# Altium PCB OpAmp_PSU_01.PcbDoc
Units mm, origin at the board's own origin, x right, y up, seen from the top; angles counter-clockwise.
Board outline 25 x 15.75 mm, 2 copper layers (Top Layer, Bottom Layer); 15 components, 9 nets, 58 pads, 14 vias.
Unrouted connection lines stored in the file: 15.
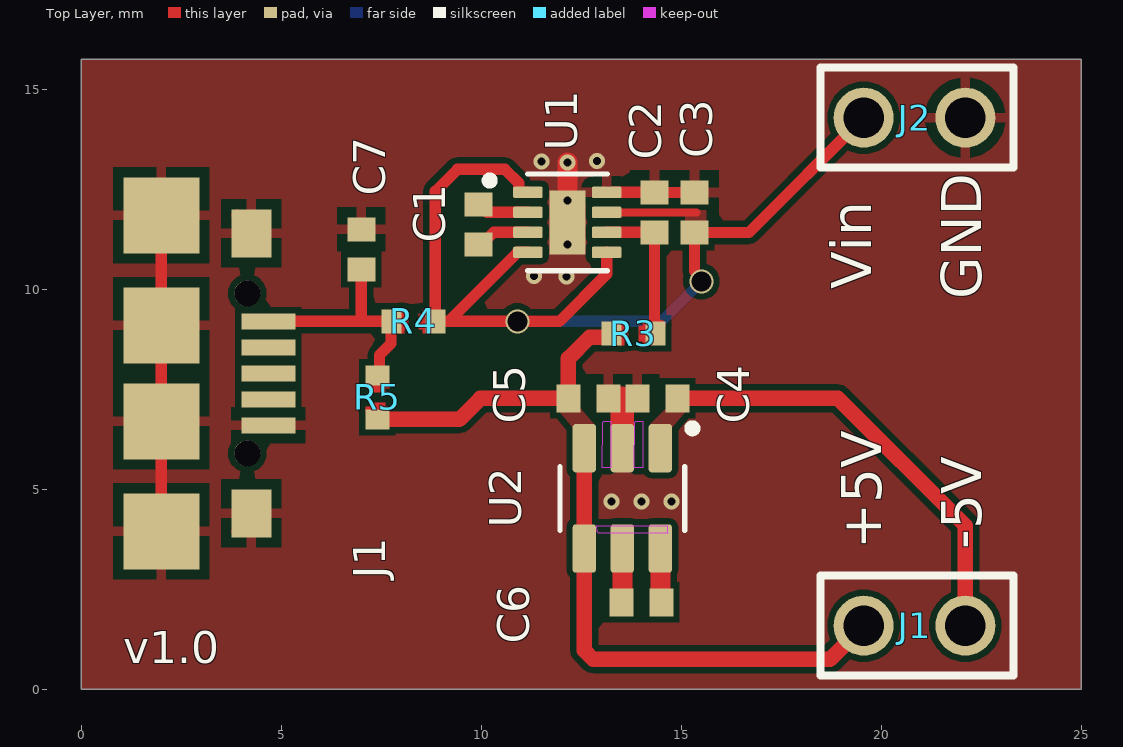
[diagram p0: Top Layer view]
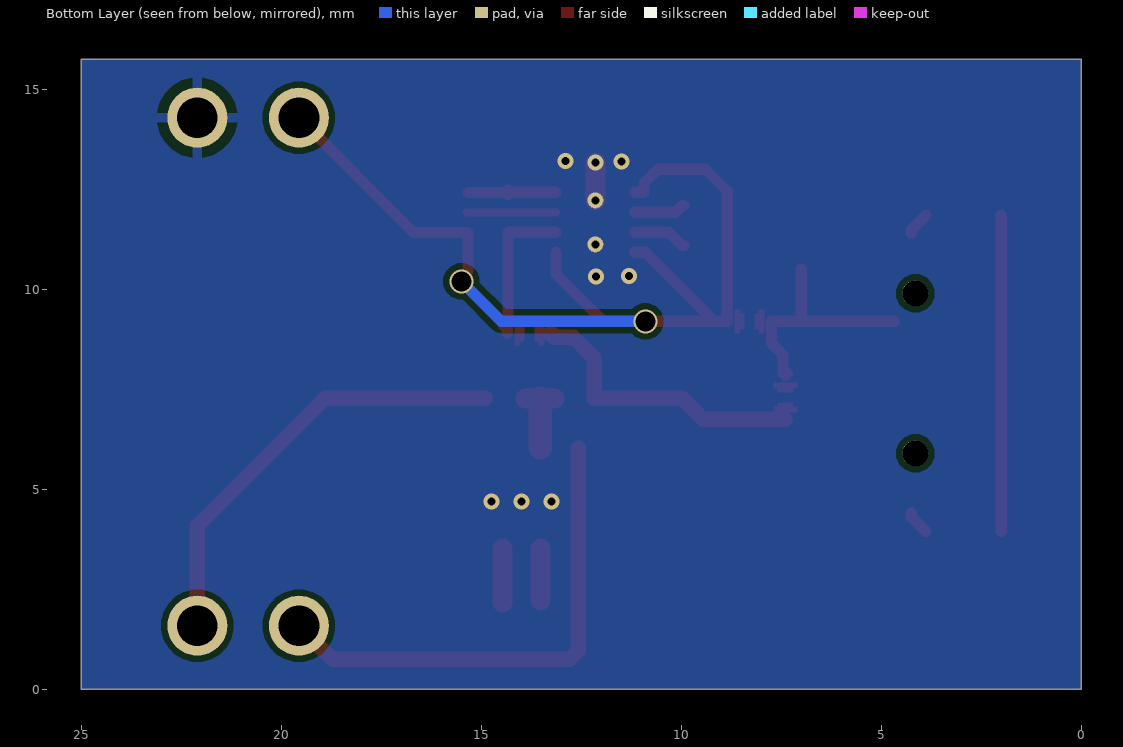
[diagram p1: Bottom Layer view, seen from below]
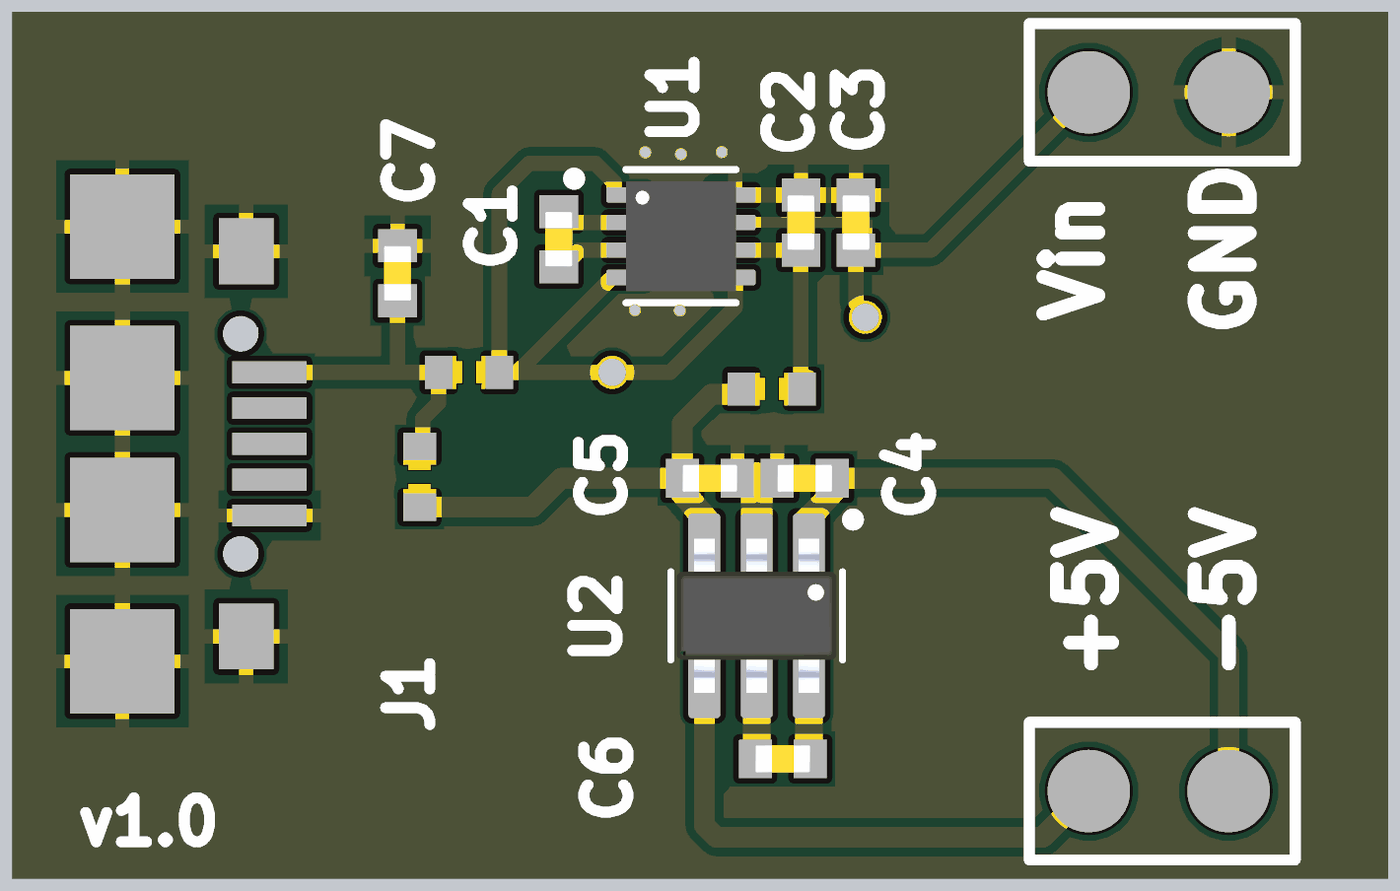
[diagram p2: 3D render of the assembled board from above, using the file's embedded part models]

## Layer stack, top to bottom
Top Solder: solder mask 0.0102, Solder Resist, Dk 3.5
Top Layer: signal copper 0.0356
Dielectric 1: dielectric 0.32, FR-4, Dk 4.8
Bottom Layer: signal copper 0.0356
Bottom Solder: solder mask 0.0102, Solder Resist, Dk 3.5

## Board outline
0,0 25,0 25,15.75 0,15.75

## Design rules (kind name [scope] priority, off if disabled: settings)
Clearance "merge with traces" [InNamedPolygon('Bottom Layer-AX1')] p1: gap=0.15 ignorepadtopadclearanceinfootprint=TRUE
Clearance [All] p2: gap=0.15 ignorepadtopadclearanceinfootprint=FALSE
HoleSize [All] p1: absolutevalues=TRUE maxlimit=6 minlimit=0.2 maxpercent=80.000 minpercent=20.000
PolygonConnect [All] p1: connectstyle=Direct reliefconductorwidth=0.254 reliefentries=4 polygonreliefangle="90 Angle" airgapwidth=0.254
RoutingVias [All] p1: holewidth=0.711 width=1.27 viastyle="Through Hole" minholewidth=0.711 minwidth=1.27 maxholewidth=0.711 maxwidth=1.27
SolderMaskExpansion [All] p1: expansion=0.102 istentingtop=FALSE
Width [All] p1: maxlimit=1 minlimit=0.15 preferedwidth=0.5 minimp=50.000000 maximp=50.000000 favimp=50.000000
29 further rules are at their usual default settings.

## Classes and differential pairs
component class OpAmp_PSU_01: C1 C2 C3 C4 C5 C6 C7 J1 J2 R3 R4 R5 U1 U2

## Components (designator, comment, footprint, x,y, rotation, side; value= is the part's Value field where it differs from the comment)
C1 "1uF 0402 Cap" "0402 CAP" 9.929,11.621 r90 top
C2 "10uF 0402 Cap" "0402 CAP" 14.329,11.921 r90 top
C3 "10uF 0402 Cap" "0402 CAP" 15.329,11.921 r90 top
C4 "10uF 0402 Cap" "0402 CAP" 14.4,7.275 r180 top
C5 "10uF 0402 Cap" "0402 CAP" 12.675,7.275 r0 top
C6 "1uF 0402 Cap" "0402 CAP" 14,2.175 r0 top
C7 "10uF 0402 Cap" "0402 CAP" 7,11 r90 top
J1 "2 1 pin straight" "2 1 PIN STARIGHT" 19.56,1.59 r0 top
J1 "USB Connectors SMD RoHS   Source:  Datasheet" C40942 2.925,7.9 r270 top
J2 "2 1 pin straight" "2 1 PIN STARIGHT" 19.56,14.29 r0 top
R3 "0402 Broken Pad" "0402 BROKEN PAD" 13.8,8.9 r180 top
R4 "0402 Broken Pad" "0402 BROKEN PAD" 8.3,9.2 r0 top
R5 "0402 Broken Pad" "0402 BROKEN PAD" 7.4,7.3 r270 top
U1 "LM2775DSGR" SON50P200X200X80-9N 12.15,11.675 r0 top
U2 "LM2776DBVR" SOT95P280X145-6N 13.525,4.775 r270 top

## Footprints (in the part's own frame and the unit in brackets; to place one, negate y for a bottom-side part, rotate by r counter-clockwise, add the part's x,y. Pads: shape width x height; smd on the part's side, far side on the other; paste and mask are expansions set on the pad)
"2 1 PIN STARIGHT" [mm]
  round 1.5 smd mask+0.05: 1(0,0) 2(2.54,0)
  round 1.5 smd far side mask+0.05: 1(0,0) 2(2.54,0)
  silkscreen extent -1.08,-1.25 3.75,1.25
"0402 BROKEN PAD" [mm]
  rect 0.5x0.6 smd: 1(-0.55,0) 2(0.55,0)
  Top Layer region: -0.275,-0.2 -0.125,-0.2 -0.125,0.2 -0.275,0.2
  Top Layer region: 0.125,-0.2 0.275,-0.2 0.275,0.2 0.125,0.2
  Top Layer region: -0.375,-0.3 -0.225,-0.3 -0.225,0.3 -0.375,0.3
  Top Layer region: 0.225,-0.3 0.375,-0.3 0.375,0.3 0.225,0.3
"0402 CAP" [mm]
  rect 0.6x0.7 smd: 1(-0.5,0) 2(0.5,0)
  body extent -0.5,-0.25 0.5,0.25, height 0.5
C40942 [mm]
  rect 0.4x1.35 smd: 1(-1.3,1.75) 2(-0.65,1.75) 3(0,1.75) 4(0.65,1.75) 5(1.3,1.75)
  round 0.65 hole 0.65 unplated: MH1(-2,1.225) MH2(2,1.225)
  rect 1.9x1.9 smd: MP1(-3.95,-0.925) MP2(3.95,-0.925) MP3(-1.2,-0.925) MP4(1.2,-0.925)
  rect 1.2x1 smd: MP5(-3.5,1.325) MP6(3.5,1.325)
SON50P200X200X80-9N [mm]
  rrect25% 0.74x0.28 smd: 1(-0.985,0.75) 2(-0.985,0.25) 3(-0.985,-0.25) 4(-0.985,-0.75) 5(0.985,-0.75) 6(0.985,-0.25) 7(0.985,0.25) 8(0.985,0.75)
  rect 0.9x1.6 smd paste-2: 9(0,0)
  round 0.4 hole 0.2 mask+0: 9_1(0,0.55) 9_2(0,-0.55)
  silkscreen extent -2.04,-1.21 1,1.21, body extent -1,-1 1,1, height 0.8
SOT95P280X145-6N [mm]
  rrect25% 1.21x0.58 smd: 1(-1.255,0.95) 2(-1.255,0) 3(-1.255,-0.95) 4(1.255,-0.95) 5(1.255,0) 6(1.255,0.95)
  silkscreen extent -1.85,-1.56 0.8,1.85, body extent -1.4,-1.45 1.4,1.45, height 1.45

## Part data
C1 C6: "C52923", Supplier Part Number 1=1276-1445-1-ND, ComponentLink1Description="New link", Supplier 1=Digi-Key
C2 C3 C4 C5 C7: "C15525", Supplier Part Number 1=1276-1451-1-ND, ComponentLink1Description="New link", Supplier 1=Digi-Key
J1: library part C40942, "C40942", Manufacturer_Name="Jing Extension of the Electronic Co.", DeviceSetName=C40942, GateName_1=G$1, Height=2.55mm, LibraryName=C40942, Manufacturer_Part_Number=C40942, Package=C40942, SymbolName_1=C40942
U1: "C473361", Package=None, Supplier Part Number 1=296-46107-1-ND, Availability=Unavailable, MF="{'manufacturer': u'Texas Instruments'}", MP=LM2775DSGR, Price=None, Supplier 1=Digi-Key
U2: "C69527", Package=None, Supplier Part Number 1=296-43957-1-ND, Availability=Unavailable, MF="{'manufacturer': u'Texas Instruments'}", MP=LM2776DBVR, Price=None, Supplier 1=Digi-Key

## Via types
v1: diameter 0.4, hole 0.2, Top Layer to Bottom Layer, tented both sides, 8 vias
v2: diameter 1.02, hole 1.02, Top Layer to Bottom Layer, 4 vias
v3: diameter 0.6, hole 0.5, Top Layer to Bottom Layer, 2 vias

## Nets (pads, with @x,y where several pads share a name; then routed paths per layer and width w, separated by ;. In a path a pad name is that pad's centre, name@x,y a point inside that pad or via, vN(x,y) a via of type N, cw(c..) or ccw(c..) an arc to the next point about the centre after c; other vN are vias at no path point)
+VOUT: C5.1 J1.1@19.56,1.59 R3.2 R5.2 U2.3 U2.4 | length 19.8
  Top Layer w0.381: R5.2 9.45,6.75 9.975,7.275 C5.1 12.175,8.275 12.702,8.802 13.191,8.802 13.25,8.861 R3.2 ; U2.3 U2.4 12.575,0.973 12.798,0.75 18.72,0.75 v2(19.56,1.59)
-VOUT: C4.1 J1.2@22.1,1.59 U2.1 | length 11
  Top Layer w0.381: C4.1 18.915,7.275 22.1,4.09 v2(22.1,1.59)
GND: C2.2 C3.2 C4.2 C5.2 C7.2 J1.5 J1.MP1 J1.MP2 J1.MP3 J1.MP4 J1.MP5 J1.MP6 J2.2 U1.8 U1.9 U1.9_1 U1.9_2 U2.2 | length 14.2
  Top Layer w0.28: J1.MP2 J1.MP4 J1.MP3 J1.MP1 ; J1.MP6@3.89,3.95 4.25,4.31 J1.MP6 ; J1.MP5@3.89,11.85 4.25,11.49 J1.MP5 ; U1.8 C2.2@14.325,12.425 ; C2.2 C3.2
  Top Layer w0.381: C2.2@14.325,12.425 C2.2
  Top Layer w0.5: U1.9_1 v1(12.15,13.166) ; C5.2 13.525,7.275 C4.2
  Top Layer w0.58: U2.2 13.525,7.275
  other v1: 13.25,4.7 14,4.7 14.75,4.7 12.129,10.324 11.313,10.331 11.5,13.2 12.891,13.203
  other v2: 22.1,14.29
NetC1_1: C1.1 U1.3 | length 1.4
  Top Layer w0.28: C1.1@9.929,11.096 9.979,11.096 10.308,11.425 U1.3
NetC1_2: C1.2 U1.2 | length 1.3
  Top Layer w0.28: C1.2@9.929,12.096 9.979,12.096 10.15,11.925 U1.2
NetC2_1: C2.1 R3.1 U1.6 | length 3.7
  Top Layer w0.28: U1.6 14.325,11.425 C2.1 R3.1@14.329,9.179 ; R3.1 14.35,9 R3.1@14.46,9.11
NetC6_1: C6.1 U2.5 | length 1.4
  Top Layer w0.381: C6.1@13.475,2.175 C6.1@13.525,2.225
  Top Layer w0.5: C6.1@13.525,2.225 U2.5
NetC6_2: C6.2 U2.6 | length 1.3
  Top Layer w0.5: C6.2@14.475,2.175 U2.6
VIN: C3.1 C7.1 J1.1@4.675,9.2 J2.1 R4.1 R4.2 R5.1 U1.1 U1.4 U1.5 U1.7 | length 34.1
  Top Layer w0.2: U1.7 15.375,11.925
  Top Layer w0.28: J1.1@4.675,9.2 7,9.2 ; C7.1 7,9.2 ; R5.1@7.35,7.9 R5.1@7.375,7.875 ; R5.1 7.456,7.906 7.456,8.356 7.744,8.644 7.744,9.194 R4.1 7,9.2 ; U1.4 10.9,10.925 9.175,9.2 ; U1.1 10.935,12.425 10.935,12.655 10.59,13 9.4,13 8.85,12.45 R4.2 9.175,9.2 ; U1.5 13.135,10.385 11.95,9.2 v3(10.9,9.2) 9.175,9.2 ; v3(15.5,10.2) 15.5,10.287 15.329,10.457 C3.1 16.691,11.421 v2(19.56,14.29)
  Bottom Layer w0.28: v3(10.9,9.2) 14.5,9.2 v3(15.5,10.2)
pads on no net: J1.2@4.675,8.55 J1.3 J1.4 J1.MH1 J1.MH2

## Polygon pours and split planes (outlines as drawn)
GND on Top Layer "NONET_L-01_P-001" (solid, remove dead copper, pour order 9): 0,15.75 0,0 25,0 25,15.75
VIN on Top Layer "NONET_L-01_P-001" (solid, pour order 5): 15.629,11.171 15.629,12.064 15.104,12.064 15.104,11.793 15.104,11.171
-VOUT on Top Layer "NONET_L-01_P-001" (solid, pour order 2): 14.65,7.575 14.65,7.05 14.2,6.6 14.2,5.525 14.75,5.525 14.75,6.525 15.15,6.987 15.15,7.575
+VOUT on Top Layer "NONET_L-01_P-001" (solid, pour order 4): 12.425,7.575 12.425,7.086 12.85,6.584 12.85,5.6 12.3,5.6 12.3,6.525 11.925,6.974 11.925,7.575
GND on Bottom Layer "NONET_L-01_P-001" (solid, pour order 10): 0,0 0,15.75 25,15.75 25,0

## Keep-outs
Top Layer:
  region: 12.89,4.086 12.896,4.092 14.654,4.092 14.654,3.914 14.668,3.9 12.932,3.9 12.896,3.936
  region: 13.842,6.682 13.863,6.703 14.036,6.703 14.036,5.545 13.829,5.545
  region: 13.042,6.682 13.063,6.703 13.236,6.703 13.236,5.535 13.029,5.535

## Silkscreen, mask and mechanical layers (free items; w line width, h text height)
Top Overlay:
  text "Vin" at 19.746,10.004 h1 r90
  text "GND" at 22.496,9.754 h1 r90
  text "+5V" at 19.996,3.504 h1 r90
  text "-5V" at 22.496,3.504 h1 r90
  text "v1.0" at 1.054,0.654 h0.8
Mechanical 14:
  the board outline again, w0.2
Mechanical 15:
  lines w0.2: 1.9,7.9 24.2,7.9 ; 22.1,1.59 22.1,14.29